# Altium PCB DIT_board.PcbDoc
Units mil, origin at the board's own origin, x right, y up, seen from the top; angles counter-clockwise.
Board outline 3950 x 3650 mil, 4 copper layers (Top Layer 1, GND, Power, Bottom Layer 1), stack 23.756 mil thick; 83 components, 77 nets, 394 pads, 0 vias.
Unrouted connection lines stored in the file: 204.
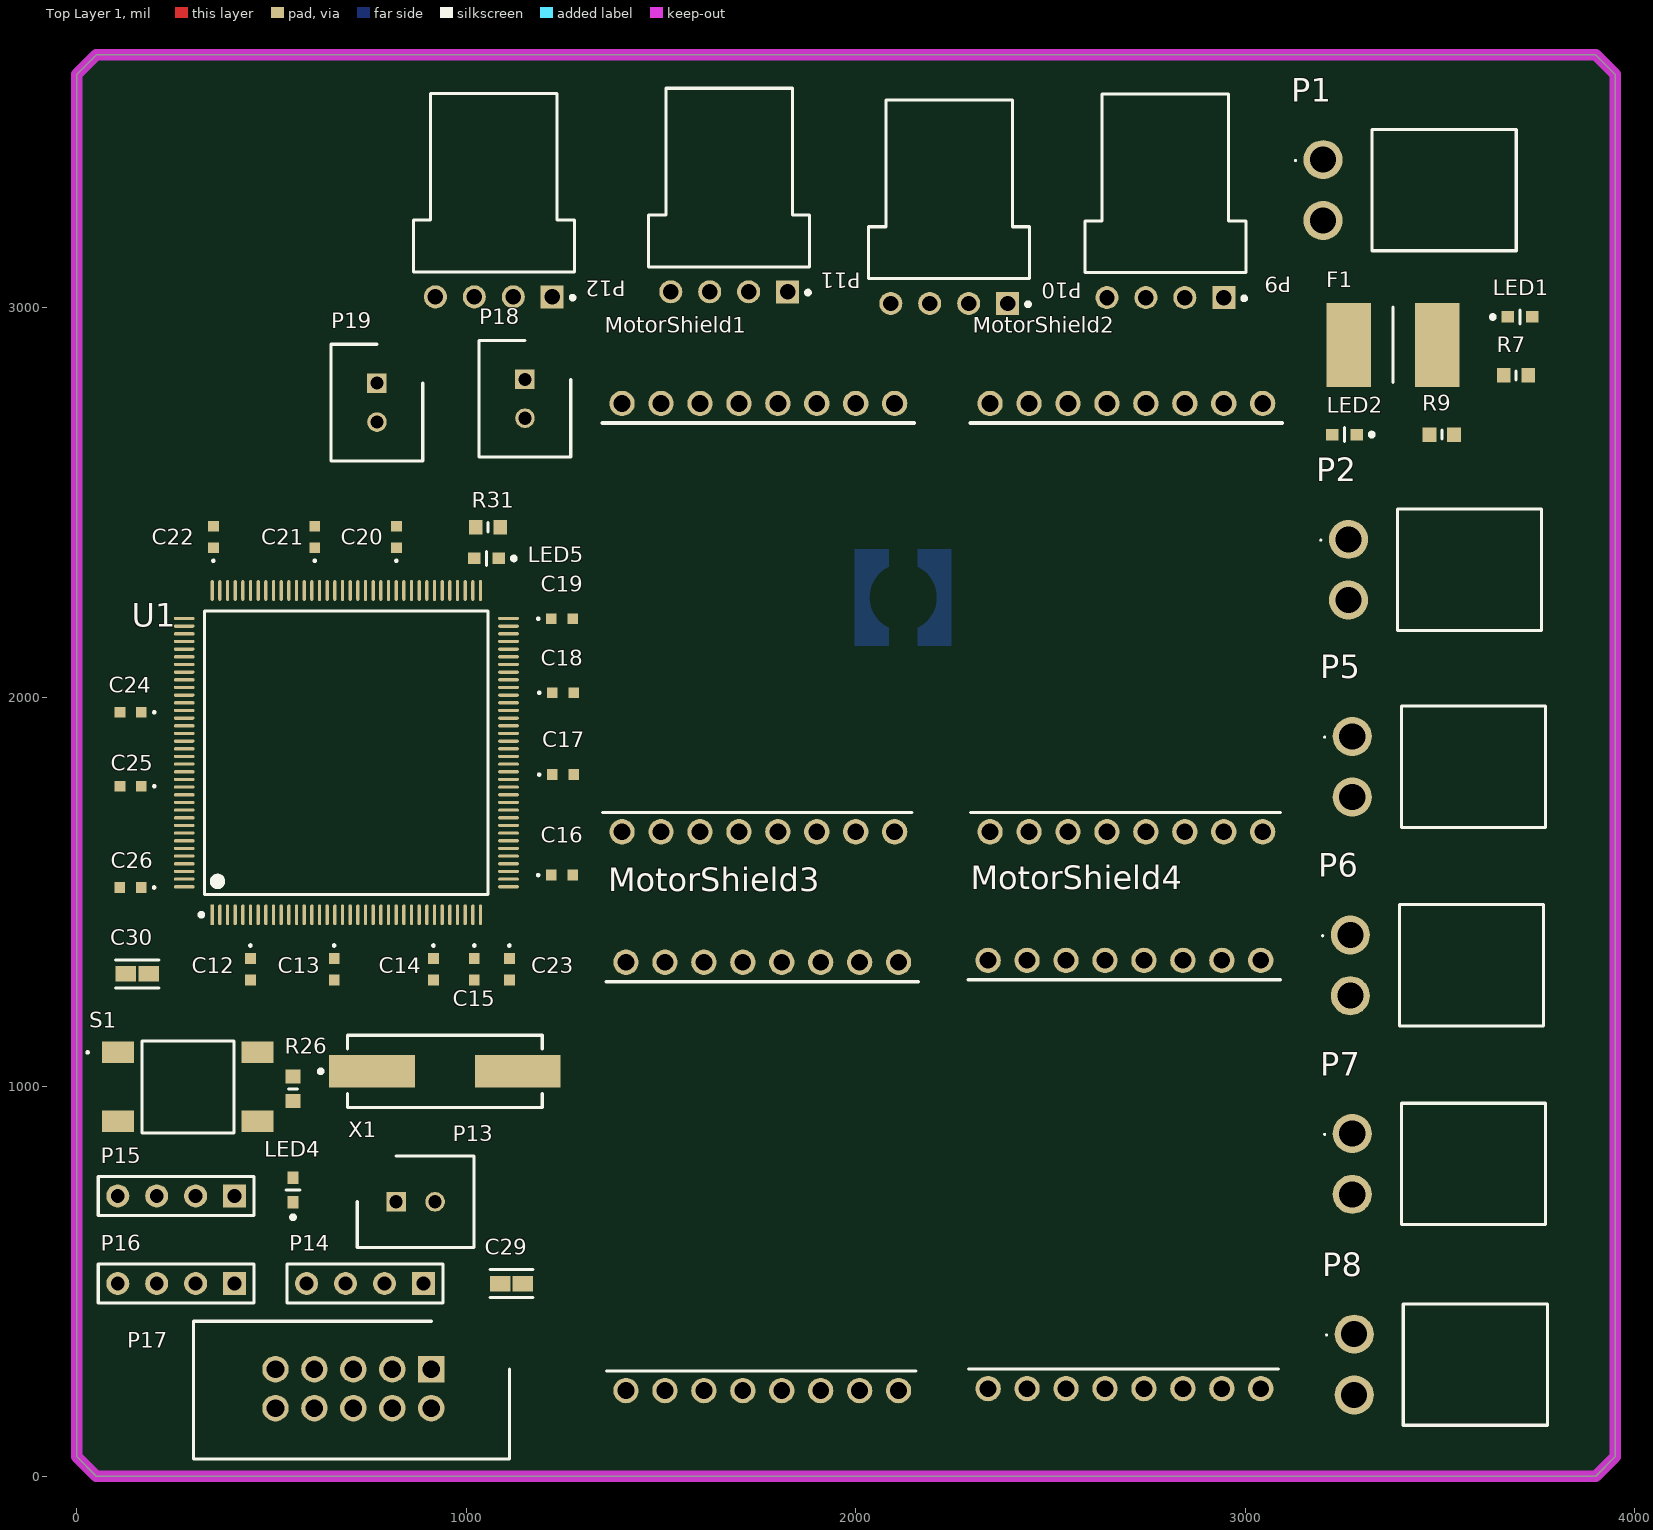
[diagram p0: Top Layer 1 view]
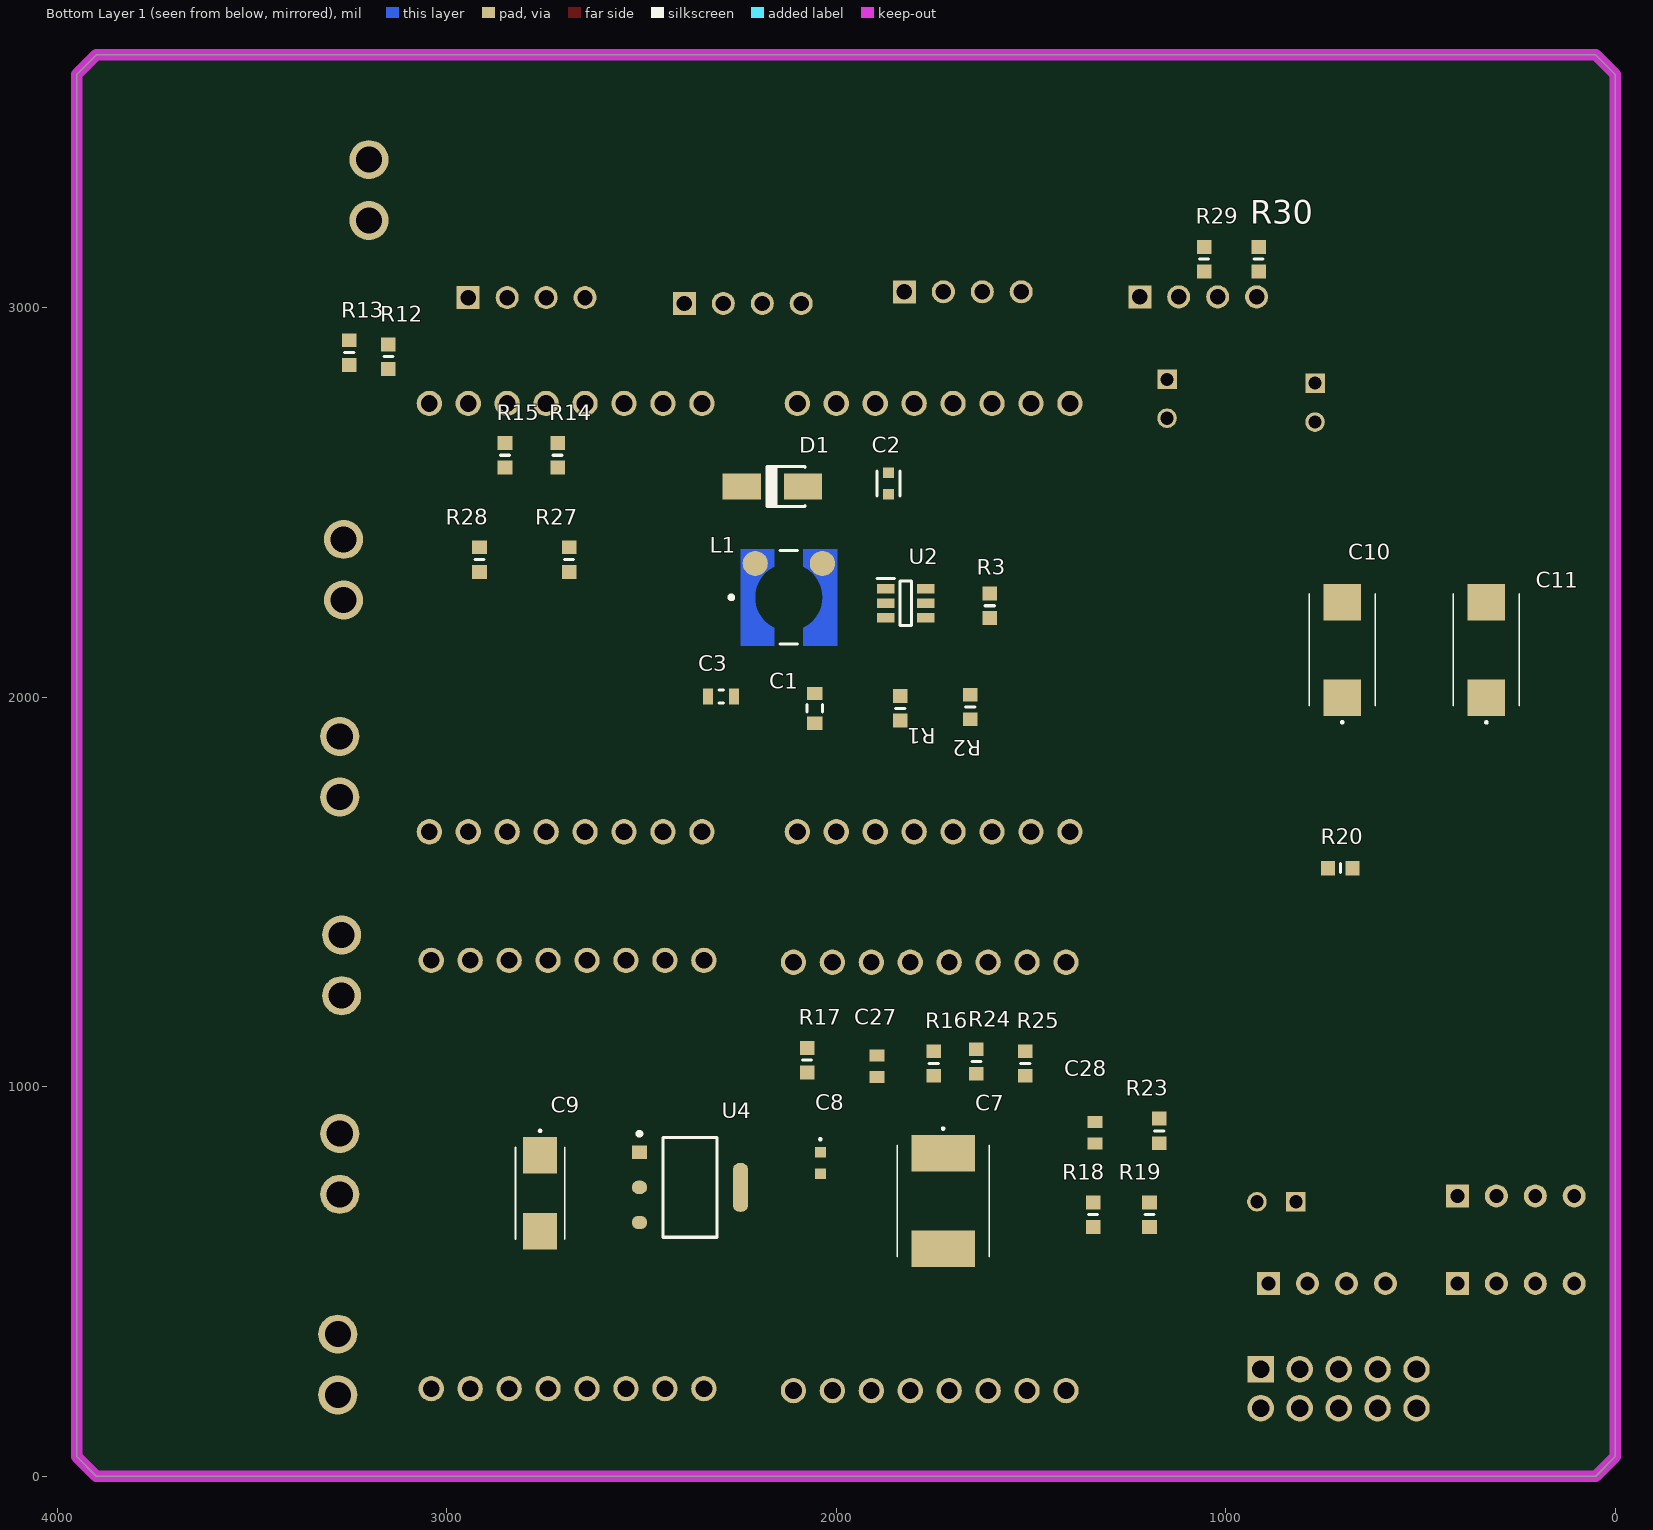
[diagram p1: Bottom Layer 1 view, seen from below]

## Layer stack, top to bottom
Top Solder: solder mask 0.4, Solder Resist, Dk 3.5
Top Layer 1: signal copper 1.378
Dielectric 2: prepreg 2.8, PP-006, Dk 4.1
GND: signal copper 1.4
Dielectric 1: dielectric 12.6, FR-4, Dk 4.8
Power: signal copper 1.4
Dielectric 3: prepreg 2.8, PP-006, Dk 4.1
Bottom Layer 1: signal copper 1.378
Bottom Solder: solder mask 0.4, Solder Resist, Dk 3.5

## Board outline
50,0 0,50 0,3600 50,3650 3900,3650 3950,3600 3950,50 3900,0

## Design rules (kind name [scope] priority, off if disabled: settings)
Clearance [All] p1: gap=10 ignorepadtopadclearanceinfootprint=FALSE except(0: Arc-Hole Track-Hole SMDPad-Hole THPad-Hole Via-Hole Fill-Hole Poly-Hole Region-Hole Text-Hole)
PolygonConnect [All] p1: connectstyle=Relief reliefconductorwidth=10 reliefentries=4 polygonreliefangle="90 Angle" airgapwidth=10
RoutingVias [All] p1: holewidth=28 width=50 viastyle="Through Hole" minholewidth=28 minwidth=50 maxholewidth=28 maxwidth=50
SolderMaskExpansion [All] p1: expansion=4 istentingtop=FALSE
Width [All] p1: maxlimit=10 minlimit=10 preferedwidth=10
30 further rules are at their usual default settings.

## Classes and differential pairs
component class VoltageRegulator: C1 C2 C3 C7 C8 C9 D1 F1 L1 LED1 LED2 LED4 P1 P2 R1 R2 R3 R7 R9 R26 R27 R28 U2 U4
component class STM32: C10 C11 C12 C13 C14 C15 C16 C17 C18 C19 C20 C21 C22 C23 C24 C25 C26 C27 C28 C29 C30 LED5 P13 R20 R23 R31 S1 U1 X1
component class Motor: MotorShield1 MotorShield2 MotorShield3 P5 P6 P7 P8 P9 P10 P11 P12 R12 R13 R14 R15 R16 R17 R18 R19
component class Communication: P14 P15 P16 P17 P18 P19 R24 R25 R29 R30

## Components (designator, comment, footprint, x,y, rotation, side; value= is the part's Value field where it differs from the comment)
C1 "10uF" FP-C1608-080-IPC_A 2055.63,1971.93 r270 bottom
C2 "10nF" FP-C1608-080-0_1-MFG 1865.63,2549.37 r270 bottom
C3 "22uF" CAPC1608X100X20ML10 2295.63,2001.93 r0 bottom
C7 "100uF" T495E 1725.63,706.93 r270 bottom
C8 "0.33uF" C1608_Commercial 2040.63,804.49 r270 bottom
C9 "22uF" T495C 2760.63,726.93 r270 bottom
C10 "2.2uF" T491D 700.63,2121.93 r90 bottom
C11 "2.2uF" T491D 330.63,2121.93 r90 bottom
C12 "4.7uF" C1608_Commercial 445.63,1301.93 r270 top
C13 "100nF" C1608_Commercial 660.63,1301.93 r270 top
C14 "100nF" C1608_Commercial 915.63,1301.93 r270 top
C15 "100nF" C1608_Commercial 1020.63,1301.93 r270 top
C16 "100nF" C1608_Commercial 1245.63,1543.9 r0 top
C17 "100nF" C1608_Commercial 1248.19,1801.93 r0 top
C18 "100nF" C1608_Commercial 1248.19,2011.93 r0 top
C19 "100nF" C1608_Commercial 1245.63,2201.93 r0 top
C20 "100nF" C1608_Commercial 820.63,2411.93 r90 top
C21 "100nF" C1608_Commercial 610.63,2411.93 r90 top
C22 "100nF" C1608_Commercial 350.63,2411.93 r90 top
C23 "100nF" C1608_Commercial 1110.63,1301.93 r270 top
C24 "100nF" C1608_Commercial 138.07,1961.93 r180 top
C25 "100nF" C1608_Commercial 138.07,1771.93 r180 top
C26 "100nF" C1608_Commercial 137.63,1511.93 r180 top
C27 "20pF" CAPC1608X90N 1895,1052.44 r270 bottom
C28 "20pF" CAPC1608X90N 1335.63,881.93 r270 bottom
C29 "0.1uF" FP-C1608-080-0_1-IPC_A 1115.85,495 r0 top
C30 "0.1uF" FP-C1608-080-0_1-IPC_A 155,1290 r180 top
D1 "B230A-13-F" DIOD-SMA-2_V 2164.37,2541.93 r0 bottom
F1 "2920L600_16MR" FUSC7451X160N 3380,2905 r0 top
L1 "4.7uH" FP-7440530047-MFG 2121.85,2256.93 r180 bottom
LED1 "150060RS55040" FP-150060RS55040-MFG 3705.63,2976.93 r0 top
LED2 "150060RS55040" FP-150060RS55040-MFG 3255,2675 r180 top
LED4 "150060RS55040" FP-150060RS55040-MFG 555,735 r90 top
LED5 "150060RS55040" FP-150060RS55040-MFG 1052.13,2356.93 r180 top
MotorShield1 "Pololu G2 18v17" "Pololu G218V17" 1825,2255 r90 top
MotorShield2 "Pololu G2 18v17" "Pololu G218V17" 2770,2255 r90 top
MotorShield3 "Pololu G2 18v17" "Pololu G218V17" 1835,820 r90 top
MotorShield4 "Pololu G2 18v17" "Pololu G218V17" 2765,825 r90 top
P1 "1744428-2" 17444282 3200,3380.91 r270 top
P2 "1744428-2" 17444282 3265,2405.91 r270 top
P5 "1744428-2" 17444282 3275,1900 r270 top
P6 "1744428-2" 17444282 3270,1390 r270 top
P7 "1744428-2" 17444282 3275,880 r270 top
P8 "1744428-2" 17444282 3280,365 r270 top
P9 "61900411021" 61900411021 2795,3320 r180 top
P10 "61900411021" 61900411021 2240,3305 r180 top
P11 "61900411021" 61900411021 1675,3335 r180 top
P12 "61900411021" 61900411021 1070.63,3321.93 r180 top
P13 "640454-2" HDRV2W66P0X254_1X2_762X572X1003P 820,705 r0 top
P14 "UART OUT" HDR1X4 890,495 r180 top
P15 "UART OUT" HDR1X4 405,720 r180 top
P16 "I2C OUT" HDR1X4 405,495 r180 top
P17 "ST-LINK" SHDR10W66P254_2X5_2035X880X920P 910,275 r180 top
P18 "640454-2" HDRV2W66P0X254_1X2_762X572X1003P 1150.63,2816.93 r270 top
P19 "640454-2" HDRV2W66P0X254_1X2_762X572X1003P 770.63,2806.93 r270 top
R1 "100k" RESC1608X55N 1835.63,1971.93 r270 bottom
R2 "49.9k" RESC1608X55N 1655.63,1975.43 r90 bottom
R3 "9.53k" RESC1608X55N 1605.63,2235.43 r90 bottom
R7 "680" RESC1608X55N 3695.63,2826.93 r180 top
R9 "200" RESC1608X55N 3505,2675 r0 top
R12 "1k" RESC1608X55N 3150,2875 r270 bottom
R13 "1k" RESC1608X55N 3250.63,2885.43 r270 bottom
R14 "1k" RESC1608X55N 2715.63,2621.93 r270 bottom
R15 "1k" RESC1608X55N 2850.63,2621.93 r270 bottom
R16 "1k" RESC1608X55N 1750,1060 r90 bottom
R17 "1k" RESC1608X55N 2075,1068.5 r90 bottom
R18 "1k" RESC1608X55N 1340.63,671.93 r90 bottom
R19 "1k" RESC1608X55N 1195.63,671.93 r90 bottom
R20 "10k" RESC1608X55N 705.63,1561.93 r180 bottom
R23 "1k" RESC1608X55N 1170.63,886.93 r90 bottom
R24 "4.7k" RESC1608X55N 1640,1065 r90 bottom
R25 "4.7k" RESC1608X55N 1515,1060 r90 bottom
R26 "91" RESC1608X55N 555,995 r270 top
R27 "0" RESC1608X55N 2686.14,2353.9 r90 bottom
R28 "0" RESC1608X55N 2916.14,2353.9 r90 bottom
R29 "10k" RESC1608X55N 1055.63,3125.43 r270 bottom
R30 "10k" RESC1608X55N 915.63,3125.43 r270 bottom
R31 "91" RESC1608X55N 1055.63,2436.93 r0 top
S1 "FSM2JSMAATR" FSM2J_1 285,1000 r90 top
U1 "STM32H723ZGT6" FP-LQFP144-1A-IPC_C 692.01,1858.29 r90 top
U2 "MP2359DJ-LF-Z" SOT95P280X100-6N 1821.81,2241.93 r180 bottom
U4 "AMS1117-3.3" FP-AMS1117-IPC_C 2375.63,741.93 r180 bottom
X1 "ABLS-8.000MHZ-B4-T" ABRA-ABLS-14.7456MHZ-B2-T_V 945,1040 r0 top

## Footprints (in the part's own frame and the unit in brackets; to place one, negate y for a bottom-side part, rotate by r counter-clockwise, add the part's x,y. Pads: shape width x height; smd on the part's side, far side on the other; paste and mask are expansions set on the pad)
17444282 [mm]
  round 2.55 hole 1.7: 1(0,0) 2(3.96,0)
  silkscreen extent -1.98,-1.85 5.94,12.6, body extent -1.98,-0.63 5.94,14.94, height 9.26
61900411021 [mm] "2.54mm Male Left Angled Header Bottom Locking, 4p"
  rect 1.5x1.5 hole 1: 1(-3.81,7.45)
  round 1.5 hole 1: 2(-1.27,7.45) 3(1.27,7.45) 4(3.81,7.45)
  silkscreen extent -5.27,-5.82 5.25,7.62, body extent -5.08,-5.75 5.08,7.77, height 5.83
ABRA-ABLS-14.7456MHZ-B2-T_V [mm] "SMD, 2-Leads, Body 11.4x4.7mm"
  rect 5.6x2.1 smd: 1(-4.75,0) 2(4.75,0)
  silkscreen extent -8.22,-2.35 6.35,2.35, body extent -6.35,-2.35 6.35,2.35, height 4.16
C1608_Commercial [mm]
  rect 0.7x0.7 smd: 1(-0.7,0) 2(0.7,0)
  silkscreen extent -1.6,-0.05 -1.5,0.05, body extent -0.8,-0.4 0.8,0.4, height 0.8
CAPC1608X90N [mm]
  rect 0.78x0.99 smd: 1(-0.7,0) 2(0.7,0)
  body extent -0.8,-0.41 0.8,0.41, height 0.9
CAPC1608X100X20ML10 [mm] "Chip Capacitor, 2-Leads, Body 1.70x0.90mm, IPC Low Density"
  rect 0.65x1.05 smd: 1(-0.85,0) 2(0.85,0)
  silkscreen extent -0.15,-0.43 0.15,0.43, body extent -0.85,-0.45 0.85,0.45, height 1
DIOD-SMA-2_V [mm] "SMA, 2-Leads, Body 4.3x2.605mm, Height 2.3mm"
  rect 2.5x1.7 smd: 1(-2,0) 2(2,0)
  silkscreen extent -2.15,-1.3 0.35,1.33, body extent -2.15,-1.3 2.15,1.3, height 2.3
FP-150060RS55040-MFG [mm]
  rect 0.8x0.75 smd paste+0 mask+0: 1(-0.8,0) 2(0.8,0)
  silkscreen extent -1.9,-0.45 0,0.45, body extent -1.3,-0.55 1.3,0.55, height 0.25
FP-7440530047-MFG [mil]
  round 64.52 smd paste+0 mask+0: 1(-86.12,87.11) 2(86.12,87.11)
  Top Layer 1 region: 124.02,124.02 124.02,-124.02 37.4,-124.02 37.4,-78.15 67.68,-54.13 84.49,-19.32 84.49,19.32 67.68,54.13 37.4,78.15 37.4,78.15 37.4,124.02
  Top Layer 1 region: -124.02,-124.02 -124.02,124.02 -37.4,124.02 -37.4,78.15 -67.68,54.13 -84.49,19.32 -84.49,-19.32 -67.68,-54.13 -37.4,-78.15 -37.4,-78.15 -37.4,-124.02
  silkscreen extent -153,-120 23,120
FP-AMS1117-IPC_C [mm]
  rect 1.004x0.872 smd paste+0 mask+0: 1(-3.295,2.29)
  rrect100% 1.004x0.872 smd paste+0 mask+0: 2(-3.295,0) 3(-3.295,-2.29)
  rrect87% 1.004x3.182 smd paste+0 mask+0: 4(3.295,0)
  silkscreen extent -3.42,-3.25 1.75,3.62, body extent -3.53,-3.25 3.53,3.25, height 1.8
FP-C1608-080-0_1-IPC_A [mil]
  rect 52.4x39.85 smd paste+0 mask+0: 1(-29.15,0) 2(29.15,0)
  silkscreen extent -55,-36 55,36, body extent -75,-40 75,40, height 10
FP-C1608-080-0_1-MFG [mm]
  rect 0.7x0.7 smd paste+0 mask+0: 1(-0.7,0) 2(0.7,0)
  silkscreen extent -0.8,-0.75 0.8,0.75, body extent -0.8,-0.4 0.8,0.4, height 0.9
FP-C1608-080-IPC_A [mm]
  rect 0.862x1.012 smd paste+0 mask+0: 1(-0.975,0) 2(0.975,0)
  silkscreen extent -0.24,-0.51 0.24,0.51, body extent -0.8,-0.4 0.8,0.4, height 0.9
FP-LQFP144-1A-IPC_C [mm]
  rect 1.355x0.212 smd paste+0 mask+0: 1(-10.575,8.75)
  rrect100% 1.355x0.212 smd paste+0 mask+0: 2(-10.575,8.25) 3(-10.575,7.75) 4(-10.575,7.25) 5(-10.575,6.75) 6(-10.575,6.25) 7(-10.575,5.75) 8(-10.575,5.25) 9(-10.575,4.75) 10(-10.575,4.25) 11(-10.575,3.75) 12(-10.575,3.25) 13(-10.575,2.75) 14(-10.575,2.25) 15(-10.575,1.75) 16(-10.575,1.25) 17(-10.575,0.75) 18(-10.575,0.25) 19(-10.575,-0.25) 20(-10.575,-0.75) 21(-10.575,-1.25) 22(-10.575,-1.75) 23(-10.575,-2.25) 24(-10.575,-2.75) 25(-10.575,-3.25) 26(-10.575,-3.75) 27(-10.575,-4.25) 28(-10.575,-4.75) 29(-10.575,-5.25) 30(-10.575,-5.75) 31(-10.575,-6.25) 32(-10.575,-6.75) 33(-10.575,-7.25) 34(-10.575,-7.75) 35(-10.575,-8.25) 36(-10.575,-8.75) 73(10.575,-8.75) 74(10.575,-8.25) 75(10.575,-7.75) 76(10.575,-7.25) 77(10.575,-6.75) 78(10.575,-6.25) 79(10.575,-5.75) 80(10.575,-5.25) 81(10.575,-4.75) 82(10.575,-4.25) 83(10.575,-3.75) 84(10.575,-3.25) 85(10.575,-2.75) 86(10.575,-2.25) 87(10.575,-1.75) 88(10.575,-1.25) 89(10.575,-0.75) 90(10.575,-0.25) 91(10.575,0.25) 92(10.575,0.75) 93(10.575,1.25) 94(10.575,1.75) 95(10.575,2.25) 96(10.575,2.75) 97(10.575,3.25) 98(10.575,3.75) 99(10.575,4.25) 100(10.575,4.75) 101(10.575,5.25) 102(10.575,5.75) 103(10.575,6.25) 104(10.575,6.75) 105(10.575,7.25) 106(10.575,7.75) 107(10.575,8.25) 108(10.575,8.75)
  rrect100% 0.212x1.355 smd paste+0 mask+0: 37(-8.75,-10.575) 38(-8.25,-10.575) 39(-7.75,-10.575) 40(-7.25,-10.575) 41(-6.75,-10.575) 42(-6.25,-10.575) 43(-5.75,-10.575) 44(-5.25,-10.575) 45(-4.75,-10.575) 46(-4.25,-10.575) 47(-3.75,-10.575) 48(-3.25,-10.575) 49(-2.75,-10.575) 50(-2.25,-10.575) 51(-1.75,-10.575) 52(-1.25,-10.575) 53(-0.75,-10.575) 54(-0.25,-10.575) 55(0.25,-10.575) 56(0.75,-10.575) 57(1.25,-10.575) 58(1.75,-10.575) 59(2.25,-10.575) 60(2.75,-10.575) 61(3.25,-10.575) 62(3.75,-10.575) 63(4.25,-10.575) 64(4.75,-10.575) 65(5.25,-10.575) 66(5.75,-10.575) 67(6.25,-10.575) 68(6.75,-10.575) 69(7.25,-10.575) 70(7.75,-10.575) 71(8.25,-10.575) 72(8.75,-10.575) 109(8.75,10.575) 110(8.25,10.575) 111(7.75,10.575) 112(7.25,10.575) 113(6.75,10.575) 114(6.25,10.575) 115(5.75,10.575) 116(5.25,10.575) 117(4.75,10.575) 118(4.25,10.575) 119(3.75,10.575) 120(3.25,10.575) 121(2.75,10.575) 122(2.25,10.575) 123(1.75,10.575) 124(1.25,10.575) 125(0.75,10.575) 126(0.25,10.575) 127(-0.25,10.575) 128(-0.75,10.575) 129(-1.25,10.575) 130(-1.75,10.575) 131(-2.25,10.575) 132(-2.75,10.575) 133(-3.25,10.575) 134(-3.75,10.575) 135(-4.25,10.575) 136(-4.75,10.575) 137(-5.25,10.575) 138(-5.75,10.575) 139(-6.25,10.575) 140(-6.75,10.575) 141(-7.25,10.575) 142(-7.75,10.575) 143(-8.25,10.575) 144(-8.75,10.575)
  silkscreen extent -10.7,-9.25 9.25,9.58, body extent -11.35,-11.35 11.35,11.35, height 0.25
FSM2J_1 [mm]
  rect 1.4x2.1 smd: 1(2.25,4.55) 2(2.25,-4.55) 3(-2.25,4.55) 4(-2.25,-4.55)
  silkscreen extent -3,-3 3,6.59, body extent -3,-5 3,5, height 4.38
FUSC7451X160N [mm]
  rect 2.9x5.45 smd: 1(-2.89,0) 2(2.89,0)
  silkscreen extent 0,-2.46 0,2.46, body extent -3.68,-2.56 3.68,2.56, height 1.6
HDR1X4 [mm] "Connector; Header; 4 Position"
  rect 1.5x1.5 hole 0.9: 1(0,0)
  round 1.5 hole 0.9: 2(2.54,0) 3(5.08,0) 4(7.62,0)
  silkscreen extent -1.27,-1.27 8.89,1.27
HDRV2W66P0X254_1X2_762X572X1003P [mm]
  rect 1.275x1.275 hole 0.85: 1(0,0)
  round 1.275 hole 0.85: 2(2.54,0)
  silkscreen extent -2.54,-2.99 5.08,2.99, body extent -1.27,-2.55 3.81,3.17, height 9.91
"Pololu G218V17" [mm]
  round 1.65 hole 1.1: 1(-15.24,10.795) 2(-15.24,8.255) 3(-15.24,5.715) 4(-15.24,3.175) 5(-15.24,0.635) 6(-15.24,-1.905) 7(-15.24,-4.445) 8(-15.24,-6.985) 9(12.7,10.795) 10(12.7,8.255) 11(12.7,5.715) 12(12.7,3.175) 13(12.7,0.635) 14(12.7,-1.905) 15(12.7,-4.445) 16(12.7,-6.985)
  silkscreen extent -13.97,-8.25 11.43,12.06
RESC1608X55N [mm]
  rect 0.9x0.95 smd: 1(-0.8,0) 2(0.8,0)
  silkscreen extent 0,-0.3 0,0.3, body extent -0.8,-0.4 0.8,0.4, height 0.55
SHDR10W66P254_2X5_2035X880X920P [mm]
  rect 1.725x1.725 hole 1.15: 1(0,0)
  round 1.725 hole 1.15: 2(0,2.54) 3(2.54,0) 4(2.54,2.54) 5(5.08,0) 6(5.08,2.54) 7(7.62,0) 8(7.62,2.54) 9(10.16,0) 10(10.16,2.54)
  silkscreen extent -5.1,-3.13 15.51,5.87, body extent -5.1,-3.13 15.26,5.67, height 9.2
SOT95P280X100-6N [mm]
  rect 1.15x0.6 smd: 1(-1.3,0.95) 2(-1.3,0) 3(-1.3,-0.95) 4(1.3,-0.95) 5(1.3,0) 6(1.3,0.95)
  silkscreen extent -1.88,-1.45 0.38,1.6, body extent -1.4,-1.45 1.4,1.45, height 1
T491D [mm]
  rect 2.37x2.43 smd: 1(-3.12,0) 2(3.12,0)
  silkscreen extent -4.77,-2.15 3.65,2.15, body extent -3.8,-2.29 3.8,2.31, height 3.11
T495C [mm]
  rect 2.37x2.23 smd: 1(-2.47,0) 2(2.47,0)
  silkscreen extent -4.12,-1.6 3,1.6, body extent -3.13,-1.75 3.18,1.75, height 2.81
T495E [mm]
  rect 2.37x4.13 smd: 1(-3.12,0) 2(3.12,0)
  silkscreen extent -4.77,-3 3.65,3, body extent -3.8,-3.18 3.8,3.13, height 3.8

## Part data
C1: library part CMP-2000-05442-2, "CAP CER 10UF 25V X5R 0603", Case Code (Imperial)=0603, Case Code (Metric)=1608, Dielectric=X5R, Dielectric Material=Ceramic, Max Operating Temperature=85°C, Min Operating Temperature=-55°C, Package Quantity=1, Tolerance=20%, Voltage Rating=25V, Capacitance=10uF, Case/Package=0603, Construction=Flat, Depth=0.8mm, Height=0.8mm, Lead Free="Lead Free", Length=1.6mm, Mount="Surface Mount", Packaging="Tape and Reel", REACH SVHC="No SVHC", Resistor Type=Ceramic, RoHS Compliant=Yes, Series=C, Termination=SMD/SMT, Thickness=0.039inch, Voltage Rating (DC)=25V, Weight=7.1E-05oz, Width=0.8mm
C2: library part CMP-08246-005687-1, "Multilayer Ceramic Capacitors 10nF ±20% 50V X5R SMD 0603", Case Code (Imperial)=0603, Case Code (Metric)=1608, Dielectric=X5R, Dielectric Material=Ceramic, Max Operating Temperature=85°C, Min Operating Temperature=-55°C, Package Quantity=4000, Tolerance=20%, Voltage Rating=50V, Capacitance=10nF, Case/Package=0603, Height=0.8mm, Lead Free="Lead Free", Length=0.063inch, Mount="Surface Mount", Packaging="Tape and Reel", Resistor Type=Ceramic, RoHS Compliant=Yes, Series=C, Termination=SMD/SMT, Thickness=0.035inch, Voltage Rating (DC)=50V, Width=0.031inch
C3: library part CMP-2000-05441-1, "Chip Capacitor, 22 uF, +/- 20%, 10 V, -55 to 85 degC, 0603 (1608 Metric), RoHS, Tape and Reel", Capacitance=22µF, Manufacturer=TDK, Operating Temperature=-55degC~85degC, Package / Case=0603(1608Metric), Package Description="2-Pin Surface Mount Device, Body 1.6 x 0.8 mm", Package Reference=603, PCN Part Number=MLCCPartNumberChange30/Nov/2012, Ratings=-, Standard Package=1, Temperature Coefficient=X5R, Tolerance=±20%, Voltage - Rated=10V, Applications=GeneralPurpose, Category=Capacitors, Datasheet URL=http://download.siliconexpert.com/pdfs/2015/4/21/15/54/45/779/tdk_/manual/37024850441143360mlcc_commercial_general_en.pdf, Datasheet Version=Mar-15, Design Resources=20WNon-IsolatedBuckLEDDriverUsingPLLNK460KG, Family=CeramicCapacitors, Features=-, Height - Seated (Max)=-, Kits=445-9014-KIT-ND-KITMLCC100PF-22UF060310-50V, Lead Spacing=-, Lead Style=-, Manufacturer URL=http://www.tdk.com/, Mounting Type=SurfaceMount,MLCC, Online Catalog=CSeries,GeneralPurpose, Other Names=445-9077-1, Packaging=CutTape(CT), Product Training Modules=CSeriesGeneralApplicationsSEAT,CCV,andTVCLDesignToolsGuidetoReplacinganElectrolyticCapacitorwithanMLCC, RoHS Information=RoHSCertificate-MLCC, Series=C, Size / Dimension="0.063\"Lx0.031\"W(1.60mmx0.80mm)", Thickness (Max)="0.035\"(0.90mm)"
C7: library part T495E107K025ATE100, "Capacitor Polarised", Manufacturer_Name=KEMET, Mouser Part Number=80-T495E107K025, Arrow Part Number=T495E107K025ATE100, Arrow Price/Stock=https://www.arrow.com/en/products/t495e107k025ate100/kemet-corporation, Datasheet Link=https://content.kemet.com/datasheets/KEM_T2009_T495.pdf, Height=3.8mm, Manufacturer_Part_Number=T495E107K025ATE100, Mouser Price/Stock=https://www.mouser.co.uk/ProductDetail/KEMET/T495E107K025ATE100?qs=m0jdfl4MgCkmn%2F5ccqVs1Q%3D%3D
C8: library part C1608X7R1H334K080AC, "Capacitor", Manufacturer_Name=TDK, Mouser Part Number=810-C1608X7R1H334K, Arrow Part Number=C1608X7R1H334K080AC, Arrow Price/Stock=https://www.arrow.com/en/products/c1608x7r1h334k080ac/tdk, Datasheet Link=https://product.tdk.com/system/files/dam/doc/product/capacitor/ceramic/mlcc/catalog/mlcc_commercial_general_en.pdf, Height=0.9mm, Manufacturer_Part_Number=C1608X7R1H334K080AC, Mouser Price/Stock=https://www.mouser.co.uk/ProductDetail/TDK/C1608X7R1H334K080AC?qs=NRhsANhppD%252BuOqJgCMjUlg%3D%3D
C9: library part T495C226K025ATE300, "Capacitor Polarised", Manufacturer_Name=KEMET, Mouser Part Number=80-T495C226K25E300, Arrow Part Number=T495C226K025ATE300, Arrow Price/Stock=https://www.arrow.com/en/products/t495c226k025ate300/kemet-corporation, Datasheet Link=https://content.kemet.com/datasheets/KEM_T2009_T495.pdf, Height=2.8mm, Manufacturer_Part_Number=T495C226K025ATE300, Mouser Price/Stock=https://www.mouser.co.uk/ProductDetail/KEMET/T495C226K025ATE300?qs=bQqEcw2qv2Rc8vCMsxIK1A%3D%3D
C10 C11: library part T491D225K050AH, "Capacitor Polarised", Manufacturer_Name=KEMET, Datasheet Link=https://content.kemet.com/datasheets/KEM_T2005_T491.pdf, Height=3.1mm, Manufacturer_Part_Number=T491D225K050AH
C12 C13 C14 C15 C16 C17 C18 C19 C20 C21 C22 C23 C24 C25 C26: library part C1608X5R1H104M080AA, "Capacitor", Manufacturer_Name=TDK, Datasheet Link=https://product.tdk.com/system/files/dam/doc/product/capacitor/ceramic/mlcc/catalog/mlcc_commercial_general_en.pdf, Height=0.9mm, Manufacturer_Part_Number=C1608X5R1H104M080AA
C27 C28: library part 06035A200FAT2A, "Capacitor", Manufacturer_Name=AVX, Mouser Part Number=581-06035A200FAT2A, Datasheet Link=https://componentsearchengine.com/Datasheets/1/06031A100FAT2A.pdf, Height=0.9mm, Manufacturer_Part_Number=06035A200FAT2A, Mouser Price/Stock=https://www.mouser.co.uk/ProductDetail/AVX/06035A200FAT2A?qs=0yaOSdwiqWsd0YnmvPoF5Q%3D%3D
C29 C30: library part CMP-08246-002719-1, "Multilayer Ceramic Capacitors 100nF ±10% 50V X5R SMD 0603", Capacitance=100nF, Case Code (Imperial)=0603, Case Code (Metric)=1608, Dielectric=X5R, Dielectric Material=Ceramic, Max Operating Temperature=85°C, Min Operating Temperature=-55°C, Package Quantity=1, Tolerance=10%, Voltage Rating=50V, Case/Package=0603, Construction=Flat, Depth=0.8mm, Height=0.8mm, Lead Free="Lead Free", Length=1.6mm, Mount="Surface Mount", Number of Pins=2, Packaging="Tape and Reel", Radiation Hardening=No, REACH SVHC="No SVHC", Resistor Type=Ceramic, RoHS Compliant=Yes, Series=C, Termination=SMD/SMT, Thickness=0.035inch, Voltage Rating (DC)=50V, Weight=7.1E-05oz, Width=0.031inch
D1: library part CMP-0905-00001-1, "2 A Surface Mount Schottky Barrier Rectifier, 30 V, -65 to 150 degC, 2-Pin SMA, RoHS, Tape and Reel", Manufacturer="Diodes Inc", Temperature Range="-65 to 150 degC", ComponentLink1Description="Manufacturer URL", ComponentLink1URL=http://diodes.com/, ComponentLink2Description=Datasheet, ComponentLink2URL=http://diodes.com/datasheets/ds13004.pdf, CT="200 pF", DatasheetVersion="Rev. 21 - 2", IF="2 A", IFSM="50 A", IO="2 A Max.", Mounting Technology="Surface Mount", PackageDescription="2-Pin SMA, Body 4.3 x 2.605 mm, Height 2.3 mm", PackageReference=SMA-2, Packing="Tape and Reel", PartNumber=B230A-13-F, RoHS=TRUE, VF="0.5 V", VR="30 V", VRRM="30 V"
F1: "Resettable Fuse", Manufacturer_Name=LITTELFUSE, Manufacturer_Part_Number=2920L600/16MR, Datasheet Link=https://m.littelfuse.com/~/media/electronics/datasheets/resettable_ptcs/littelfuse_ptc_2920l_datasheet.pdf.pdf, Height=1.6mm
L1: library part CMP-0227-00415-2, "FIXED IND 4.7UH 2.4A 38 MOHM SMD", Case Code (Imperial)=2323, Case Code (Metric)=5858, Current Rating=2.4A, DC Resistance (DCR)=38mR, Inductance Tolerance=30%, Max DC Current=2A, Max Operating Temperature=125°C, Min Operating Temperature=-40°C, Package Quantity=1, Resistor Type=Wirewound, Saturation Current=1.95A, Self Resonant Frequency=40MHz, Test Frequency=100kHz, Case/Package=2323, Core Material=Ferrite, Depth=5.8mm, Height=2.8mm, Height - Seated (Max)=0.118inch, Inductance=4.7uH, Lead Free="Lead Free", Length=5.8mm, Mount="Surface Mount", Number of Pins=2, Packaging="Cut Tape", RMS Current (Irms)=2.4A, RoHS Compliant=Yes, Series=WE-TPC, Series Resistance=38mR, Shielding=Shielded, Termination=SMD/SMT, Tolerance=30%, Weight=0.013334oz, Width=5.8mm
LED1 LED2 LED4 LED5: library part CMP-207942-000007-1, "LED RED DIFFUSED 0603 SMD", Case Code (Imperial)=0603, Case Code (Metric)=1608, Color=Red, Forward Voltage=2V, Test Current=20mA, Case/Package=0603, Dominant Wavelength=624nm, Height=0.5mm, Length=1.6mm, Lens Size=0.8mm, Lens Style=Flat, Lens Transparency=Diffused, Luminous Intensity=90mcd, Mount="Surface Mount", Packaging="Cut Tape", RoHS Compliant=No, Viewing Angle=140°, Width=0.8mm
MotorShield1 MotorShield2 MotorShield3 MotorShield4: "DC Motor Driver"
P1 P2 P5 P6 P7 P8: "Connector", Manufacturer_Name="TE Connectivity", Mouser Part Number=571-1744428-2, Datasheet Link=https://www.te.com/commerce/DocumentDelivery/DDEController?Action=srchrtrv&DocNm=1744428&DocType=Customer+Drawing&DocLang=English, Height=8.8mm, Manufacturer_Part_Number=1744428-2, Mouser Price/Stock=https://www.mouser.co.uk/ProductDetail/TE-Connectivity/1744428-2?qs=%2F6W%2F9%2FHWvcDoOfykajFB2Q%3D%3D
P9 P10 P11 P12: library part CMP-1502-00594-1, "Male Bottom Locking Header WR-WTB, THT, Right Angled, pitch 2.54 mm, 1 x 4 position", Contact Resistance=20mOhm, Manufacturer="Wurth Elektronik", Operating Temperature=-40to105degC, Working Voltage=250VAC, Datasheet URL=https://katalog.we-online.de/em/datasheet/6190xx11021.pdf, Gender=Male, Manufacturer URL=http://www.we-online.de, Mounting Technology=THT, Orientation=RightAngled, Package Reference=61900411021, Packaging=Bag, Part Number=61900411021, Pitch=2.54mm, Position=1x4, Publisher=WurthElektronik
P13 P18 P19: "Connector", Manufacturer_Name="TE Connectivity", Datasheet Link=https://datasheet.datasheetarchive.com/originals/distributors/Datasheets_SAMA/0152b3901a0ba380c7a54e62cba96e15.pdf, Height=10.03mm, Manufacturer_Part_Number=640454-2
P14 P15 P16: library part "Header 4", "Header, 4-Pin", LatestRevisionDate=17-Jul-2002, LatestRevisionNote="Re-released for DXP Platform.", Publisher="Altium Limited"
P17: library part 1-1634688-0, "Connector", Manufacturer_Name="TE Connectivity", Datasheet Link=https://componentsearchengine.com/Datasheets/2/1-1634688-0.pdf, Height=9.2mm, Manufacturer_Part_Number=1-1634688-0
R1 R2 R3 R7 R9 R12 R13 R14 R15 R16 R17 R18 R19 R20 R23 R24 R25 R26 R27 R28 R29 R30 R31: library part CMP0603-FX-1003ELF, "Resistor", Manufacturer_Name=Bourns, Datasheet Link=https://www.mouser.co.uk/datasheet/2/54/Bourns_CMP_Datasheet_05.28.20-1854233.pdf, Height=0.55mm, Manufacturer_Part_Number=CMP0603-FX-1003ELF
S1: "Switch", Manufacturer_Name="TE Connectivity", Datasheet Link=http://www.te.com/commerce/DocumentDelivery/DDEController?Action=showdoc&DocId=Customer+Drawing%7F2-1437565-7%7FV%7Fpdf%7FEnglish%7FENG_CD_2-1437565-7_V.pdf%7F2-1437565-9, Manufacturer_Part_Number=FSM2JSMAATR
U1: library part CMP-12105-000148-1, "IC MCU 32BIT 1MB FLASH 144LQFP"
U2: "Integrated Circuit", Manufacturer_Name="Monolithic Power Systems (MPS)", Mouser2 Part Number=946-MP2359DJLFZ, Datasheet Link=https://componentsearchengine.com//MP2359DJ-LF-Z.pdf, Height=1mm, Manufacturer_Part_Number=MP2359DJ-LF-Z, Mouser2 Price/Stock=https://www.mouser.com/Search/Refine.aspx?Keyword=946-MP2359DJLFZ
U4: library part CMP-209535-000001-1, "LDO Voltage Regulators 1A, 3.3V", Dropout Voltage=1.1V, Manufacturer="Advanced Monolithic Systems", Max Junction Temp=+125°C, Max Power Dissipation=1.2W, Max Supply Voltage=15V, Nominal Supply Current=5mA, Output Current=1A, Output Voltage=3.3V, Package=AMS1117, Temperature="-40°C to +125°C", Temperature Range Low=-40°C, Automotive=No, Category=IC, ComponentLink2Description=Datasheet, ComponentLink2URL=http://www.advanced-monolithic.com/pdf/ds1117.pdf, Device Class L1="Integrated Circuits (ICs)", Device Class L2="Power Management ICs", Device Class L3="Voltage Regulators - Linear", Height=1.8mm, Ipc Land Pattern Name=SOT229P700X180-4, Lead Free=Yes, Manufacturer Part Number=AMS1117-3.3, Number Of Outputs=1, Octopart=https://octopart.com/ams1117-3.3-advanced+monolithic+systems-25899300, Output Type=Fixed, RoHS=TRUE, Standoff Height=0.64mm, Temperature Range High=+125°C
X1: library part CMP-2000-05726-1, "Low Profile Crystal, 8.0 MHz, +/- 30 ppm, -20 to 70 degC, 2-Pin SMD, RoHS, Tape and Reel", Case Height=4.2mm, Case Length=11.4mm, Case Width=4.7mm, Frequency=8MHz, Frequency Stability=50PPM, Load Capacitance=18pF, Manufacturer=ABRACON, Operating Temperature Range=-20Cto+70C, Package / Case=HC-49/US, Package Description="2-Pin Surface Mount Device, Body 11.4 x 4.7 mm", Package Reference=ABLS-14.7456MHZ-B2-T, Tolerance=30PPM, Brand=ABRACON, Datasheet URL=http://www.abracon.com/Resonators/abls.pdf, Datasheet Version=04/2011, Dimensions=4.7mmWx11.4mmLx4.2mmH, ESR=80Ohms, Factory Pack Quantity=1000, Manufacturer URL=http://www.abracon.com/, Mounting Style=SMD/SMT, Mounting Technology=SurfaceMount, Package URL=http://www.abracon.com/Support/PackageDrawing/Resonators/ABLS-2D.pdf, Packaging=Reel, Product Category=Crystals, RoHS=Details, Series=ABLS, Termination Style=SMD/SMT, Type=LowProfileMicroprocessorCrystal

## Nets (pads, with @x,y where several pads share a name; then routed paths per layer and width w, separated by ;. In a path a pad name is that pad's centre, name@x,y a point inside that pad or via, vN(x,y) a via of type N, cw(c..) or ccw(c..) an arc to the next point about the centre after c; other vN are vias at no path point)
GND: C3.1 C7.2 C8.2 C9.2 C10.2 C11.2 C19.2 C27.2 C28.2 C29.1 C30.1 D1.1 LED2.1 LED4.1 LED5.1 P9.2 P10.2 P11.2 P12.2 P13.2 P14.1 P15.1 P16.1 P17.3 P17.4 P18.2 P19.2 R3.2 R20.2 R27.1 R28.1 S1.1 U1.31 U2.2
NetC2_1: C2.1 D1.2 L1.1 U2.6
NetC2_2: C2.2 U2.1
NetC10_1: C10.1 U1.71
NetC11_1: C11.1 U1.106
NetC12_2: C12.2 C13.2 C14.2 C15.2 C16.2 C17.2 C18.2 C20.2 C21.2 C22.2 C23.2 C24.2 C25.2 C26.2
NetC27_1: C27.1 U1.23 X1.1
NetC28_1: C28.1 R23.1 X1.2
NetC29_2: C29.2 C30.2 P13.1 P17.1 S1.3 U1.25
NetLED1_2: LED1.2 R7.2
NetLED2_2: LED2.2 R9.2
NetLED4_2: LED4.2 R26.2
NetLED5_2: LED5.2 R31.2
NetMotorShield1_2: MotorShield1.2 U1.77
NetMotorShield1_3: MotorShield1.3 U1.76
NetMotorShield1_11: MotorShield1.11 MotorShield1.12 P5.1
NetMotorShield1_13: MotorShield1.13 MotorShield1.14 P5.2
NetMotorShield2_2: MotorShield2.2 U1.74
NetMotorShield2_3: MotorShield2.3 U1.75
NetMotorShield2_11: MotorShield2.11 MotorShield2.12 P6.1
NetMotorShield2_13: MotorShield2.13 MotorShield2.14 P6.2
NetMotorShield3_2: MotorShield3.2 U1.2
NetMotorShield3_3: MotorShield3.3 U1.4
NetMotorShield3_11: MotorShield3.11 MotorShield3.12 P7.1
NetMotorShield3_13: MotorShield3.13 MotorShield3.14 P7.2
NetMotorShield4_2: MotorShield4.2 U1.7
NetMotorShield4_3: MotorShield4.3 U1.5
NetMotorShield4_11: MotorShield4.11 MotorShield4.12 P8.1
NetMotorShield4_13: MotorShield4.13 MotorShield4.14 P8.2
NetP9_3: P9.3 R13.1 U1.110
NetP9_4: P9.4 R12.1 U1.133
NetP10_3: P10.3 R15.1 U1.35
NetP10_4: P10.4 R14.1 U1.34
NetP11_3: P11.3 R17.1 U1.134
NetP11_4: P11.4 R16.1 U1.135
NetP12_3: P12.3 R19.1 U1.82
NetP12_4: P12.4 R18.1 U1.81
NetP14_2: P14.2
NetP14_3: P14.3
NetP15_2: P15.2
NetP15_3: P15.3
NetP16_3: P16.3 R24.2
NetP16_4: P16.4 R25.2
NetP17_2: P17.2
NetP17_5: P17.5
NetP17_6: P17.6
NetP18_1: P18.1 R29.1 U1.89
NetP19_1: P19.1 R30.1 U1.90
NetR1_2: R1.2 U2.4
NetR2_2: R2.2 R3.1 U2.3
NetR20_1: R20.1 U1.138
NetR23_2: R23.2 U1.24
NetR31_1: R31.1 U1.96
NetU1_1: U1.1
NetU1_3: U1.3
NetU1_36: U1.36
NetU1_69: U1.69
NetU1_73: U1.73
NetU1_78: U1.78
NetU1_85: U1.85
NetU1_101: U1.101
NetU1_102: U1.102
NetU1_103: U1.103
NetU1_104: U1.104
NetU1_105: U1.105
NetU1_109: U1.109
NetU1_136: U1.136
NetU1_137: U1.137
PGND: LED1.1
PGND1: C1.2 MotorShield1.1 MotorShield1.9 MotorShield1.10 MotorShield2.1 MotorShield2.9 MotorShield2.10 MotorShield3.1 MotorShield3.9 MotorShield3.10 MotorShield4.1 MotorShield4.9 MotorShield4.10 P1.2 R27.2
PGND2: R28.2
V3.3: C9.1 C12.1 C13.1 C14.1 C15.1 C16.1 C17.1 C18.1 C19.1 C20.1 C21.1 C22.1 C23.1 C24.1 C25.1 C26.1 P14.4 P15.4 P17.7 P17.8 R26.1 R29.2 R30.2 U1.6 U1.17 U1.30 U1.32 U1.33 U1.39 U1.52 U1.62 U1.72 U1.84 U1.95 U1.108 U1.121 U1.131 U1.144 U4.2 U4.4
V5: R24.1 R25.1
V5a: C3.2 C7.1 C8.1 L1.2 P9.1 P10.1 P11.1 P12.1 P16.2 R2.1 R9.1 R12.2 R13.2 R14.2 R15.2 R16.2 R17.2 R18.2 R19.2 U4.3
V12a: C1.1 F1.1 P1.1 R1.1 R7.1 U2.5
V12b: F1.2 P2.1
VM: MotorShield1.15 MotorShield1.16 MotorShield2.15 MotorShield2.16 MotorShield3.15 MotorShield3.16 MotorShield4.15 MotorShield4.16 P2.2
pads on no net: MotorShield1.4 MotorShield1.5 MotorShield1.6 MotorShield1.7 MotorShield1.8 MotorShield2.4 MotorShield2.5 MotorShield2.6 MotorShield2.7 MotorShield2.8 MotorShield3.4 MotorShield3.5 MotorShield3.6 MotorShield3.7 MotorShield3.8 MotorShield4.4 MotorShield4.5 MotorShield4.6 MotorShield4.7 MotorShield4.8 P17.9 P17.10 S1.2 S1.4 U1.8 U1.9 U1.10 U1.11 U1.12 U1.13 U1.14 U1.15 U1.16 U1.18 U1.19 U1.20 U1.21 U1.22 U1.26 U1.27 U1.28 U1.29 U1.37 U1.38 U1.40 U1.41 U1.42 U1.43 U1.44 U1.45 U1.46 U1.47 U1.48 U1.49 U1.50 U1.51 U1.53 U1.54 U1.55 U1.56 U1.57 U1.58 U1.59 U1.60 U1.61 U1.63 U1.64 U1.65 U1.66 U1.67 U1.68 U1.70 U1.79 U1.80 U1.83 U1.86 U1.87 U1.88 U1.91 U1.92 U1.93 U1.94 U1.97 U1.98 U1.99 U1.100 U1.107 U1.111 U1.112 U1.113 U1.114 U1.115 U1.116 U1.117 U1.118 U1.119 U1.120 U1.122 U1.123 U1.124 U1.125 U1.126 U1.127 U1.128 U1.129 U1.130 U1.132 U1.139 U1.140 U1.141 U1.142 U1.143 U4.1

## Keep-outs
Keep-Out Layer:
  the board outline again, w30